# Altium PCB NEW_PCB.pcbdoc
Units mil, origin at the board's own origin, x right, y up, seen from the top; angles counter-clockwise.
Board outline 5218.84 x 4281.32 mil, 2 copper layers (Top Layer, Bottom Layer); 17 components, 10 nets, 48 pads, 0 vias.
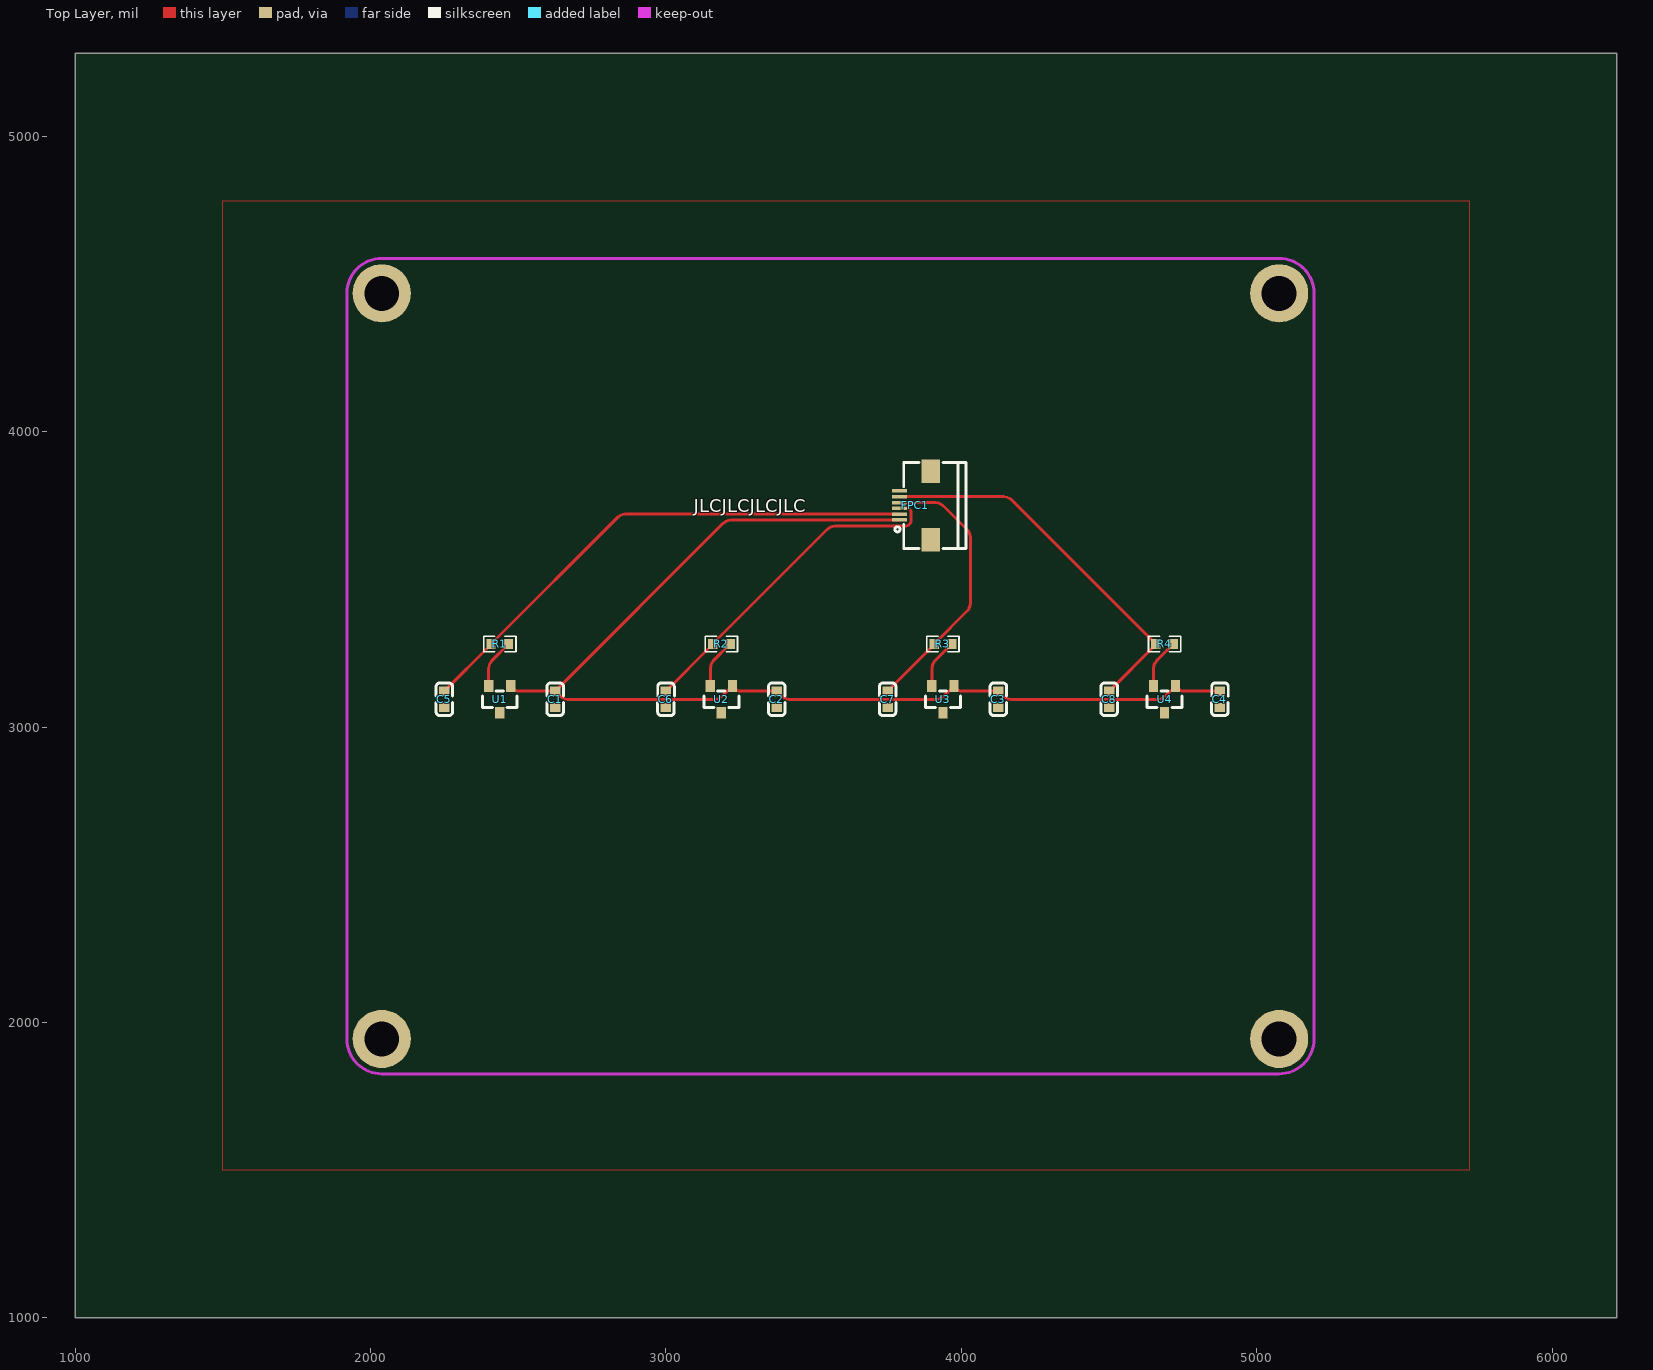
[diagram p0: Top Layer view]
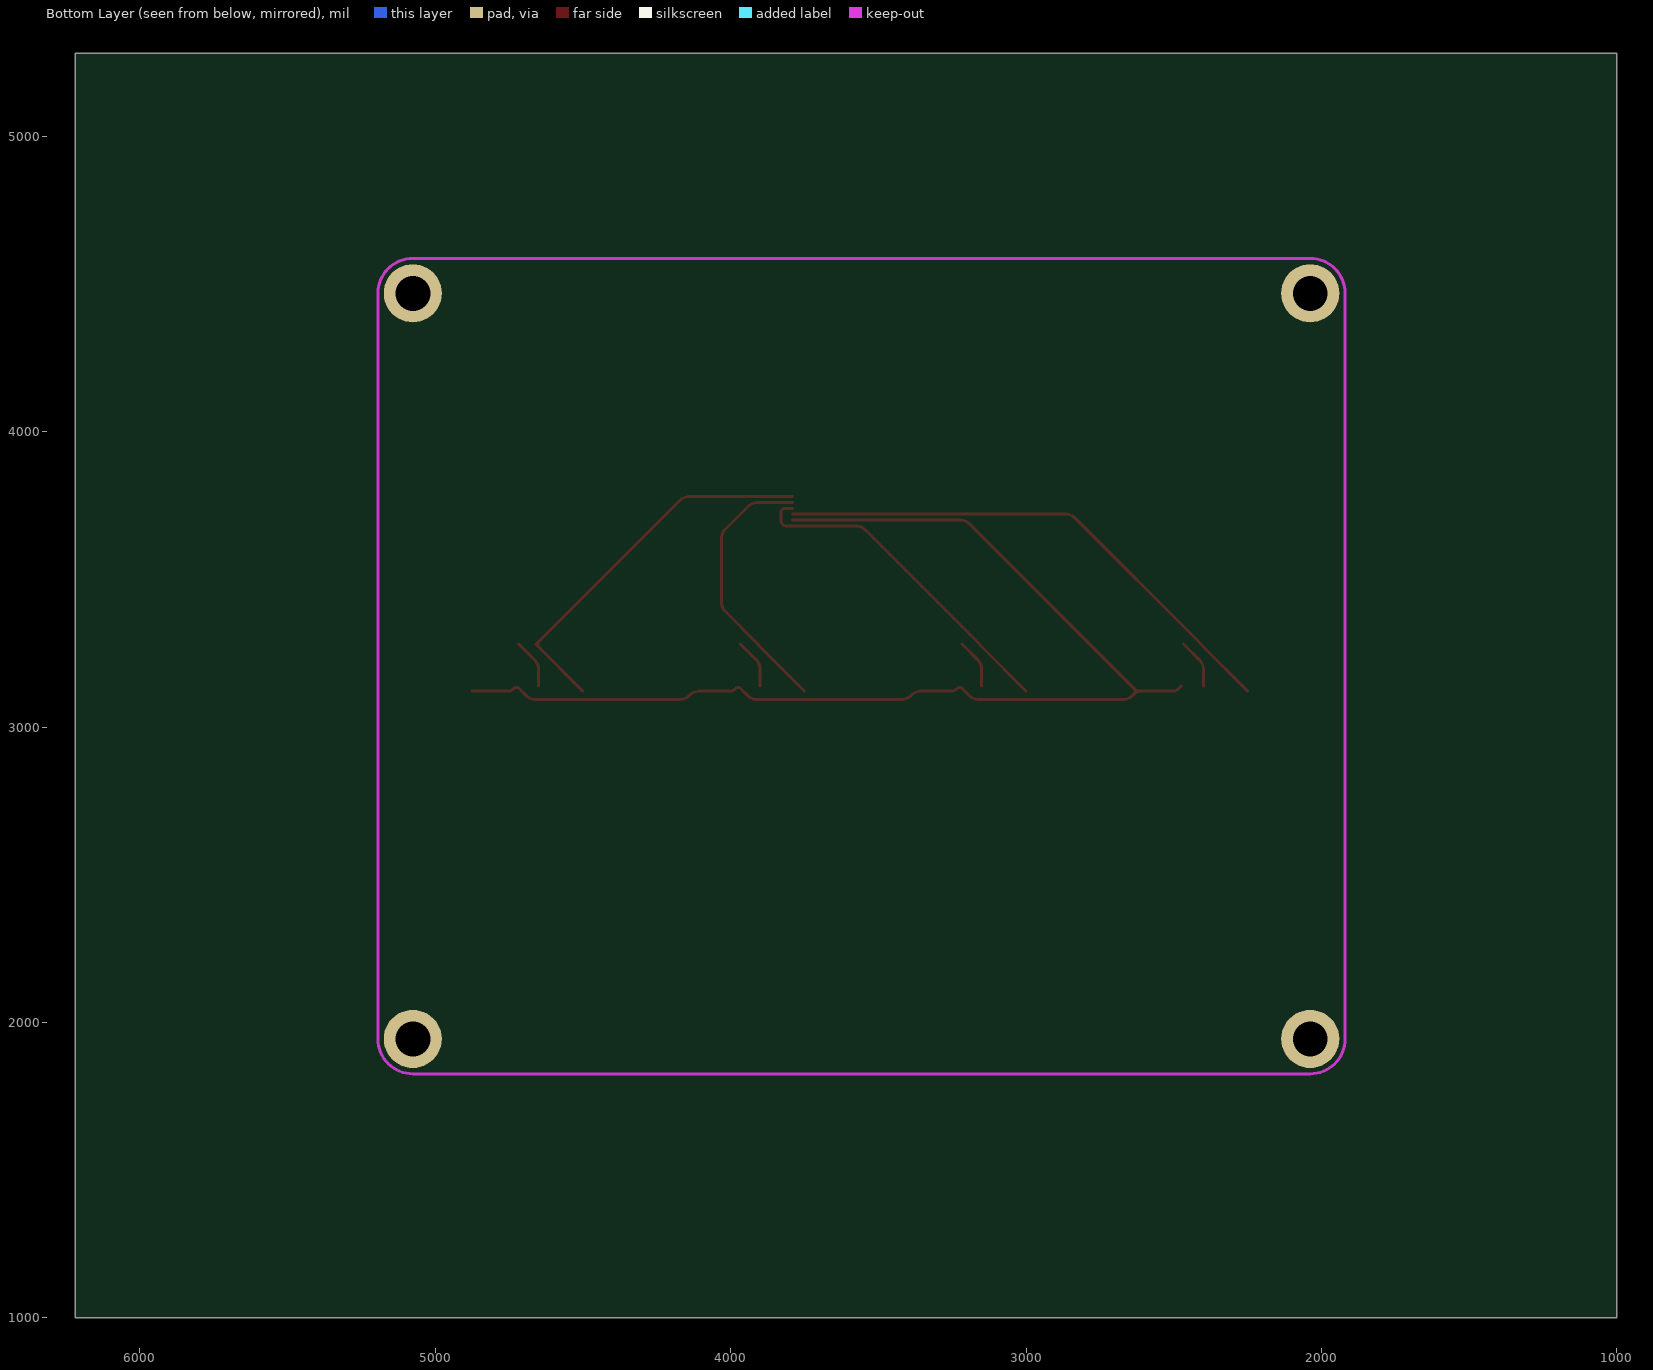
[diagram p1: Bottom Layer view, seen from below]

## Layer stack, top to bottom
Top Layer: signal copper (thickness not stored)
Dielectric: dielectric 12.6, FR-4, Dk 4.8
Bottom Layer: signal copper (thickness not stored)

## Board outline
6218.84,1000 1000,1000 1000,5281.32 6218.84,5281.32

## Components (designator, comment, footprint, x,y, rotation, side; value= is the part's Value field where it differs from the comment)
C1 "0.1u" C0603 2625.02,3093.78 r270 top
C2 "0.1u" C0603 3375.04,3093.78 r270 top
C3 "0.1u" C0603 4125.06,3093.78 r270 top
C4 "0.1u" C0603 4875.07,3093.78 r270 top
C5 "0.1u" C0603 2250.02,3093.78 r270 top
C6 "0.1u" C0603 3000.03,3093.78 r270 top
C7 "0.1u" C0603 3750.05,3093.78 r270 top
C8 "0.1u" C0603 4500.06,3093.78 r270 top
FPC1 "AFC01-S06FCA-00" FPC-SMD_P0.50-6P_AFC01-S06FCA-00 3843.8,3750.05 r90 top
R1 "1k" R0603 2437.52,3281.29 r180 top
R2 "1k" R0603 3187.54,3281.29 r180 top
R3 "1k" R0603 3937.55,3281.29 r180 top
R4 "1k" R0603 4687.57,3281.29 r180 top
U1 "DRV5056A2QDBZR" SOT-23_L2.9-W1.3-P1.90-LS2.4-BR 2437.52,3093.78 r90 top
U2 "DRV5056A2QDBZR" SOT-23_L2.9-W1.3-P1.90-LS2.4-BR 3187.54,3093.78 r90 top
U3 "DRV5056A2QDBZR" SOT-23_L2.9-W1.3-P1.90-LS2.4-BR 3937.55,3093.78 r90 top
U4 "DRV5056A2QDBZR" SOT-23_L2.9-W1.3-P1.90-LS2.4-BR 4687.57,3093.78 r90 top

## Footprints (in the part's own frame and the unit in brackets; to place one, negate y for a bottom-side part, rotate by r counter-clockwise, add the part's x,y. Pads: shape width x height; smd on the part's side, far side on the other; paste and mask are expansions set on the pad)
C0603 [mm]
  rect 0.8x0.9 smd paste+0 mask+0.051: 1(-0.7,0) 2(0.7,0)
  silkscreen extent -1.41,-0.71 1.39,0.72
FPC-SMD_P0.50-6P_AFC01-S06FCA-00 [mm]
  rect 0.3x1.3 smd paste+0 mask+0.051: 1(-1.248,1.339) 2(-0.748,1.339) 3(-0.248,1.339) 4(0.252,1.339) 5(0.752,1.339) 6(1.252,1.339)
  rect 2x1.6 smd paste+0 mask+0.051: 7(-2.95,-1.339) 8(2.95,-1.339)
  silkscreen extent -3.72,-4.36 3.7,1.75
R0603 [mil]
  rect 31.75x34.02 smd paste-3937.01 mask+2: 1(-29.66,0) 2(29.66,0)
  silkscreen extent -55,-26 55,26
SOT-23_L2.9-W1.3-P1.90-LS2.4-BR [mm]
  rect 1x0.8 smd paste+0 mask+0.051: 1(1.15,-0.95) 2(1.15,0.95) 3(-1.15,0)
  silkscreen extent -0.7,-1.5 0.7,1.5

## Free pads (board coordinates)
  round 196.85 hole 118.11 paste+0 mask+2: 1(5075.53,4468.01) 2(2038.16,4468.01) 3(2038.16,1944.43) 4(5075.53,1944.43)

## Nets (pads, with @x,y where several pads share a name; then routed paths per layer and width w, separated by ;. In a path a pad name is that pad's centre, name@x,y a point inside that pad or via, vN(x,y) a via of type N, cw(c..) or ccw(c..) an arc to the next point about the centre after c; other vN are vias at no path point)
GND: C1.2 C2.2 C3.2 C4.2 C5.2 C6.2 C7.2 C8.2 FPC1.6 pad.1 pad.2 pad.3 pad.4 U1.3 U2.3 U3.3 U4.3
K1: C5.1 FPC1.2 R1.2 | length 1788.6
  Top Layer w10: C5.1 2407.86,3279.19 R1.2 2836.81,3710.24 2844.41,3715.32 2852.87,3718.82 2861.84,3720.61 FPC1.2
K2: C6.1 FPC1.3 R2.2 | length 1145.1
  Top Layer w10: C6.1 3157.88,3279.19 R2.2 3546.7,3670.19 3554.31,3675.28 3562.76,3678.78 3571.73,3680.56 3814.23,3680.56 3821.13,3683.42 3826.41,3688.7 3829.27,3695.61 3829.27,3729.71 3827.24,3734.57 3823.49,3738.26 3818.62,3740.26 FPC1.3
K3: C7.1 FPC1.4 R3.2 | length 928.9
  Top Layer w10: C7.1 3907.89,3279.19 R3.2 4020.9,3394.3 4025.98,3401.9 4029.48,3410.36 4031.27,3419.33 4031.27,3641.6 4029.49,3650.57 4025.99,3659.03 4020.91,3666.64 3938.03,3749.59 3930.43,3754.68 3921.98,3758.18 3913.01,3759.96 FPC1.4
K4: C8.1 FPC1.5 R4.2 | length 1320.3
  Top Layer w10: FPC1.5 4144.88,3779.66 4153.85,3777.87 4162.3,3774.37 4169.91,3769.29 R4.2 4657.91,3279.19 C8.1 ; R4.2@4648.35,3269.63 ccw(c4637.74,3280.24) R4.2@4648.35,3290.85
U1_2: R1.1 U1.2 | length 168.1
  Top Layer w10: U1.2 2400.12,3199.56 2401.9,3208.54 2405.41,3216.99 2410.49,3224.6 R1.1
U2_2: R2.1 U2.2 | length 179.2
  Top Layer w10: U2.2@3150.17,3150.16 3150.17,3139.06 3150.14,3199.57 3151.92,3208.54 3155.43,3216.99 3160.51,3224.6 R2.1
U3_2: R3.1 U3.2 | length 168.1
  Top Layer w10: U3.2@3900.15,3139.06 3900.15,3199.56 3901.93,3208.53 3905.43,3216.99 3910.52,3224.59 R3.1
U4_2: R4.1 U4.2 | length 168.1
  Top Layer w10: U4.2 4650.17,3199.57 4651.95,3208.54 4655.45,3216.99 4660.54,3224.6 R4.1
VCC: C1.1 C2.1 C3.1 C4.1 FPC1.1 U1.1 U2.1 U3.1 U4.1 | length 3958.3
  Top Layer w10: U1.1 2485.88,3128.09 2490.83,3124.78 2496.33,3122.51 2502.17,3121.34 C1.1 ; C1.1@2633.56,3112.81 ccw(c2612.95,3092.2) 2612.95,3121.34 ccw(c2612.95,3150.49) C1.1@2633.56,3129.88 ; C1.1@2635.63,3110.74 cw(c2646.24,3121.34) C1.1@2635.63,3131.95 ; FPC1.1 3219.26,3700.91 3210.29,3699.13 3201.83,3695.63 3194.23,3690.55 C1.1 ; C4.1 4752.22,3121.34 4746.38,3122.51 4740.69,3124.86 4736.08,3127.95 4732.06,3131.96 4727.46,3133.87 4722.48,3133.87 4717.88,3131.96 4690.07,3104.15 4682.46,3099.07 4674.01,3095.57 4665.03,3093.78 4167.28,3093.78 4158.31,3095.57 4149.85,3099.07 4142.25,3104.15 4135.43,3110.97 4127.82,3116.06 4119.36,3119.56 4110.39,3121.34 4002.21,3121.34 3996.37,3122.51 3990.68,3124.86 3986.07,3127.95 3982.05,3131.96 3977.45,3133.87 3972.47,3133.87 3967.86,3131.96 3940.06,3104.15 3932.45,3099.07 3924,3095.57 3915.03,3093.78 3417.26,3093.78 3408.29,3095.57 3399.84,3099.07 3392.23,3104.15 3385.41,3110.97 3377.8,3116.06 3369.35,3119.56 3360.38,3121.34 3252.19,3121.34 3246.35,3122.51 3240.66,3124.86 3236.05,3127.95 3232.03,3131.96 3227.43,3133.87 3222.45,3133.87 3217.84,3131.96 3190.04,3104.15 3182.43,3099.07 3173.98,3095.57 3165.01,3093.78 2667.25,3093.78 2658.28,3095.57 2649.82,3099.07 2642.22,3104.15 C1.1
pads on no net: FPC1.7 FPC1.8

## Polygon pours and split planes (outlines as drawn)
GND on Top Layer (solid): 1500,4781.32 5718.84,4781.32 5718.84,1500 1500,1500

## Keep-outs
Keep-Out Layer:
  lines w10: 1920.05,1944.44 ccw(c2038.15,1944.44) 2038.15,1826.33 ; 1920.05,4468.02 cw(c2038.15,4468.02) 2038.15,4586.12 ; 5075.52,1826.33 ccw(c5075.52,1944.44) 5193.63,1944.44 ; 5075.52,4586.12 cw(c5075.52,4468.02) 5193.63,4468.02

## Silkscreen, mask and mechanical layers (free items; w line width, h text height)
Top Overlay:
  text "JLCJLCJLCJLC" at 3093.79,3727.54 h45